# EAGLE board Driver Motor (EAGLE 9.5.0)
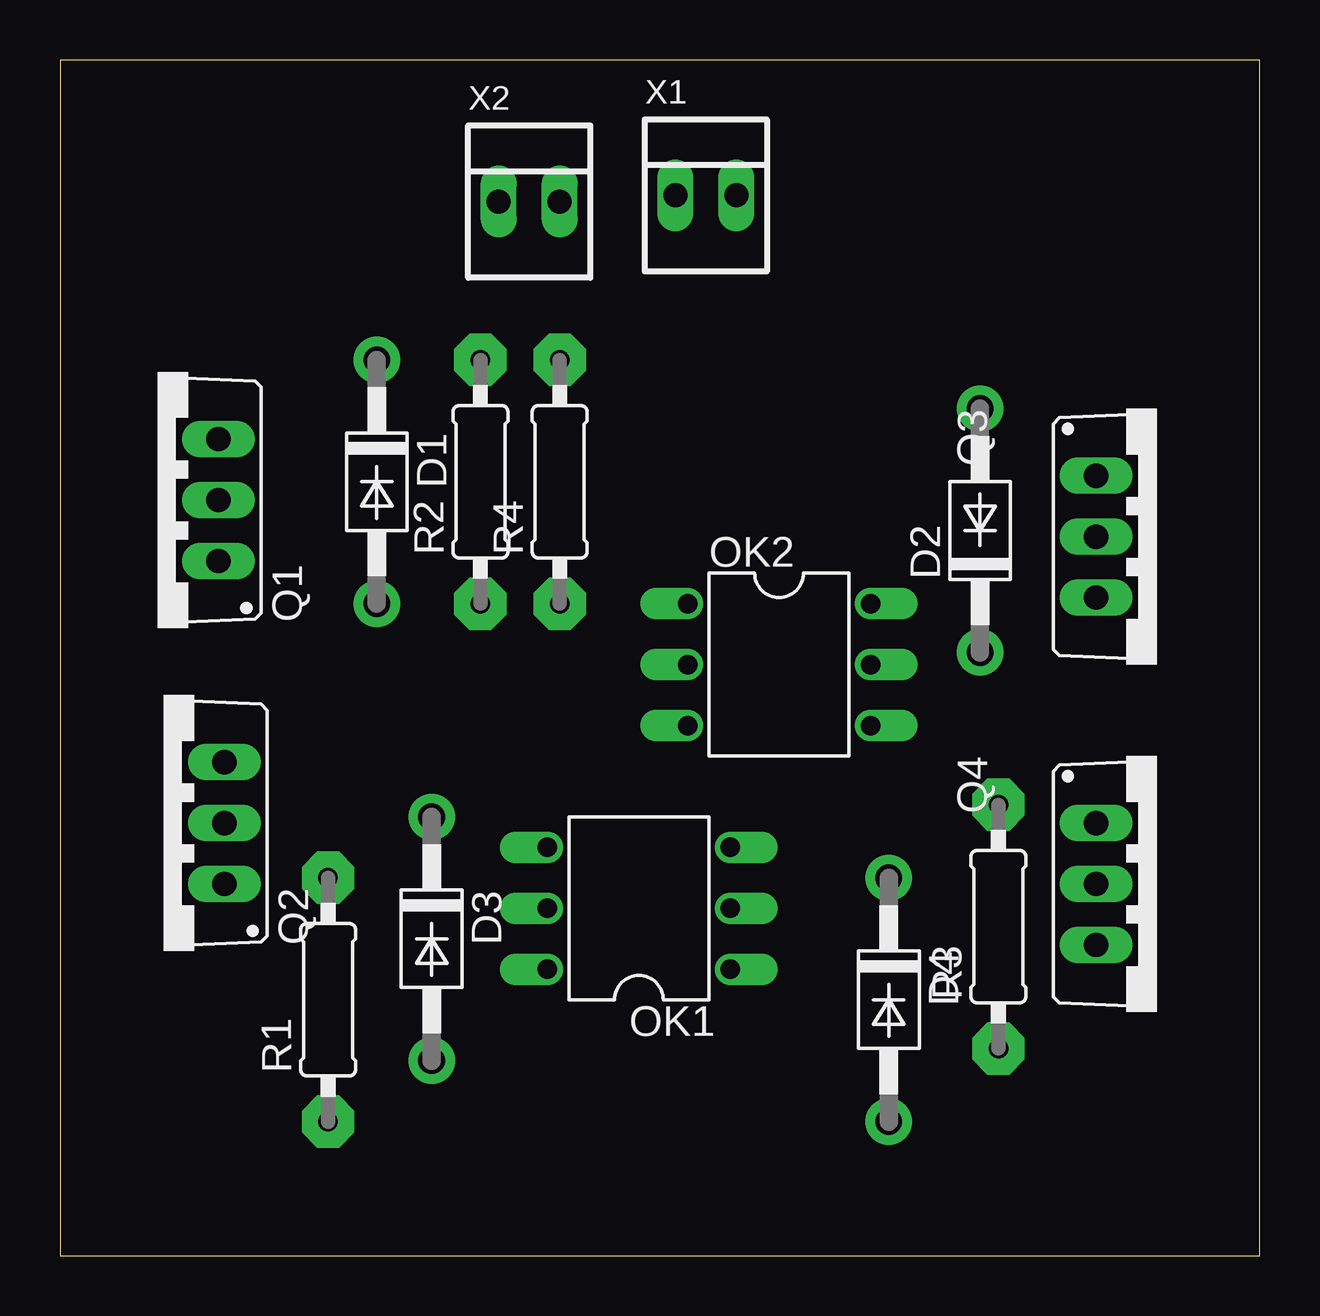
[diagram p0: board, top side]
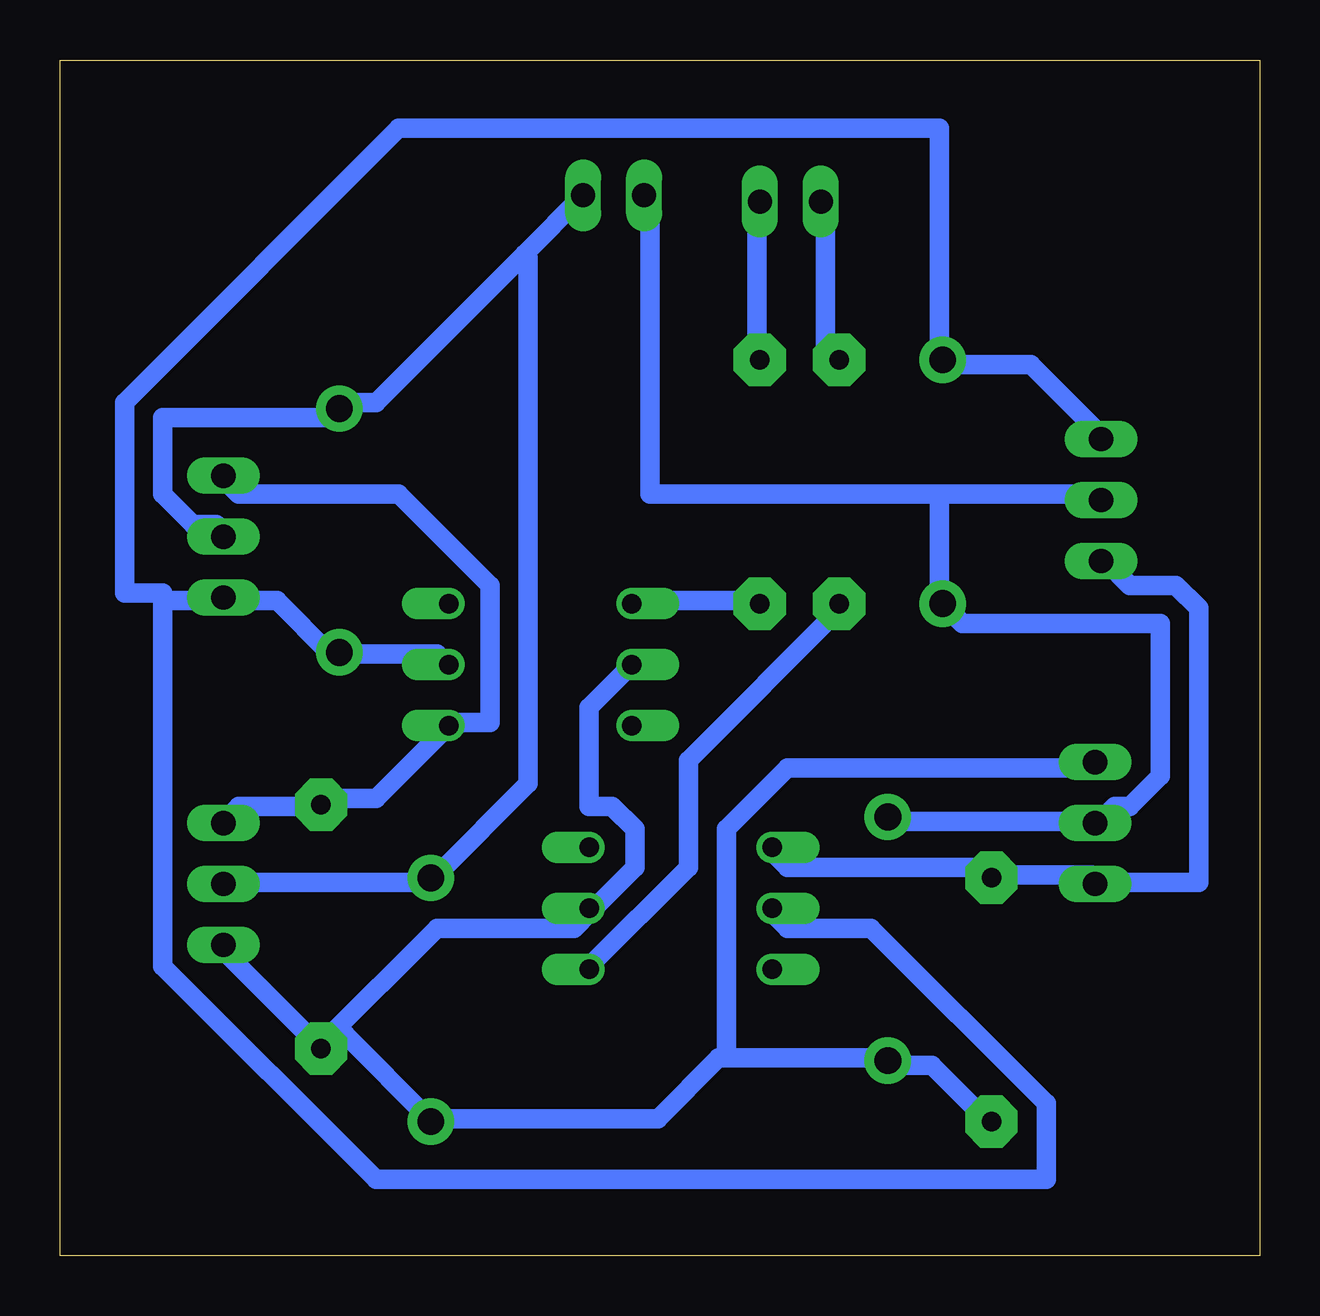
[diagram p1: board, bottom side, seen from below]

Size 50 x 49.84 mm. Coordinates in mm from the lower left corner, seen from the top.
Outline: 0,0 50,0 50,49.84 0,49.84 0,0
Copper layers (1*16): Top 0.035mm / dielectric 1.5mm / Bottom 0.035mm
Design rules "default *": minimum track width 32mil, minimum drill 0.35mm, track to track 24mil, track to pad 24mil, pad to pad 24mil, via to via 24mil, smd to smd 24mil, copper to edge 40mil, drill to drill 6mil, minimum pad ring 10mil, minimum via ring 8mil, stop-mask expansion 4mil, vias tented up to drill 0mil, thermal gap 10mil

## Footprints (pad centres in the part's own frame; a part is rotated, then mirrored left to right if it is on the bottom)
DO41-10 = drill 1.118 pad 1.93: A 5.08,0; C -5.08,0
DIL06 = drill 0.813 offset: 1 -2.54,-3.81; 2 0,-3.81; 3 2.54,-3.81; 4 2.54,3.81; 5 0,3.81; 6 -2.54,3.81
TO220BV = drill 1.016 long: D 0,-2.54; G -2.54,-2.54; S 2.54,-2.54
0207/10 = drill 0.813 pad 2.184 octagon: 1 -5.08,0; 2 5.08,0
22-23-2021 = drill 1 long: 1 -1.27,0; 2 1.27,0

## Placement (x,y rotation side)
D1  1N4004  [DO41-10]  13.21,32.26 270 top
D2  1N4004  [DO41-10]  38.35,30.23 90 top
D3  1N4004  [DO41-10]  15.49,13.21 270 top
D4  1N4004  [DO41-10]  34.54,10.67 270 top
OK1  4N35  [DIL06]  24.13,14.48 90 top
OK2  4N35  [DIL06]  29.97,24.64 270 top
Q1  IRF9530  [TO220BV]  4.06,31.5 90 top
Q2  IRF530  [TO220BV]  4.32,18.03 90 top
Q3  IRF9530  [TO220BV]  45.72,29.97 270 top
Q4  IRF530  [TO220BV]  45.72,15.49 270 top
R1  10k  [0207/10]  11.18,10.67 90 top
R2  [0207/10]  17.53,32.26 90 top
R3  10k  [0207/10]  39.12,13.72 90 top
R4  [0207/10]  20.83,32.26 90 top
X1  22-23-2021  [22-23-2021]  26.92,44.2 0 top
X2  22-23-2021  [22-23-2021]  19.56,43.94 0 top

## Library data of the parts
D1-D4 = diode
OK1 OK2 = optocoupler; MF: FAIRCHILD SEMICONDUCTOR; MPN: 4N35; OC_FARNELL: 1328375; OC_NEWARK: 72K9946
Q1-Q4 = transistor-power
R1-R4 = rcl; SPICEPREFIX: R
X1 X2 = con-molex; MF: MOLEX; MPN: 22-23-2021; OC_FARNELL: 1462926; OC_NEWARK: 25C3832

## Nets
GND: D3.A D4.A OK1.2 OK2.2 Q2.S Q4.S R1.1 R3.1
N$1: OK1.1 R2.1
N$2: OK1.4 Q1.G Q2.G R1.2
N$3: D1.A D3.C Q1.D Q2.D X1.1
N$4: R4.2 X2.2
N$5: OK2.4 Q3.G Q4.G R3.2
N$6: D2.A D4.C Q3.D Q4.D X1.2
N$7: R2.2 X2.1
N$8: OK2.1 R4.1
VCC: D1.C D2.C OK1.5 OK2.5 Q1.S Q3.S

## Tracks (layer width: path | path; a pad name or v marks a point on that pad's centre or on a via)
GND
  Bottom 0.813: 22.23,8.26 22.23,17.78 19.68,20.32 6.99,20.32 Q2.S | 22.23,8.26 15.56,8.26 D3.A 15.24,7.94 13.65,7.94 11.43,5.71 R1.1 | R3.1 39.05,8.89 34.29,13.65 28.57,13.65 27.94,14.29 OK1.2 27.62,14.61 26.04,16.19 26.04,17.78 26.99,18.73 27.94,18.73 27.94,22.86 OK2.2 | R3.1 43.18,12.7 Q4.S | R3.1 38.42,9.21 38.1,9.21 34.61,5.71 D4.A 34.29,5.71 25.08,5.71 22.54,8.26 22.23,8.26
N$1
  Bottom 0.813: OK1.1 27.94,12.06 23.81,16.19 23.81,20.64 17.46,26.99 R2.1
N$2
  Bottom 0.813: OK1.4 20.32,16.83 19.68,16.19 11.75,16.19 11.43,15.88 R1.2 10.79,15.88 6.99,15.88 Q2.G 6.67,15.56 2.54,15.56 2.54,26.99 3.49,27.94 5.4,27.94 6.35,28.89 Q1.G
N$3
  Bottom 0.813: D3.C 15.24,18.1 6.99,18.1 Q2.D 6.67,18.1 6.03,18.73 5.4,18.73 4.13,20 4.13,26.35 12.38,26.35 D1.A 13.34,27.3 13.34,31.75 | 13.34,31.75 6.67,31.75 Q1.D | 13.34,31.75 25.4,31.75 25.4,44.13 X1.1
N$4
  Bottom 0.813: X2.2 20.95,43.81 20.95,37.47 R4.2
N$5
  Bottom 0.813: Q4.G 43.18,18.1 42.55,18.73 39.37,18.73 R3.2 39.05,19.05 36.83,19.05 OK2.4 33.66,22.23 32.07,22.23 32.07,27.94 35.88,31.75 42.55,31.75 43.18,32.38 Q3.G
N$6
  Bottom 0.813: Q4.D 43.18,15.56 34.61,15.56 D4.C 34.29,15.88 30.48,19.68 30.48,41.59 30.64,41.75 | 30.64,41.75 36.83,35.56 38.1,35.56 D2.A 38.42,34.92 45.72,34.92 45.72,31.75 44.45,30.48 43.5,30.48 43.18,30.16 Q3.D | 30.64,41.75 X1.2
N$7
  Bottom 0.813: X2.1 18.1,43.81 18.1,37.47 17.78,37.47 R2.2
N$8
  Bottom 0.813: OK2.1 26.04,27.3 20.95,27.3 R4.1
VCC
  Bottom 0.813: Q1.S 6.67,34.29 9.53,37.15 13.02,37.15 D1.C 13.34,37.47 13.34,46.99 35.88,46.99 47.31,35.56 47.31,27.62 45.72,27.62 45.72,27.3 | OK2.5 33.97,24.77 34.29,25.08 38.1,25.08 D2.C 38.73,25.08 40.96,27.3 42.86,27.3 Q3.S 43.18,27.3 45.72,27.3 | 45.72,27.3 45.72,12.06 36.83,3.17 8.89,3.17 8.89,6.35 16.19,13.65 19.68,13.65 20.32,14.29 OK1.5